# Altium PCB PCB.PcbDoc
Units mm, origin at the board's own origin, x right, y up, seen from the top; angles counter-clockwise.
Board outline 12.7 x 10.16 mm, 2 copper layers (Top Layer, Bottom Layer); 5 components, 8 nets, 20 pads, 0 vias.
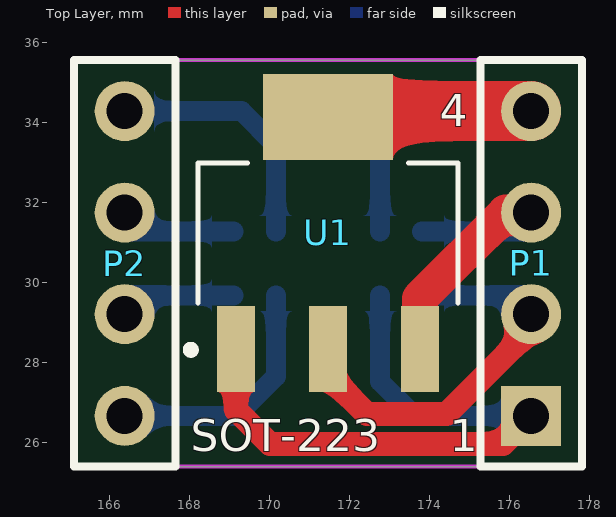
[diagram p0: Top Layer view]
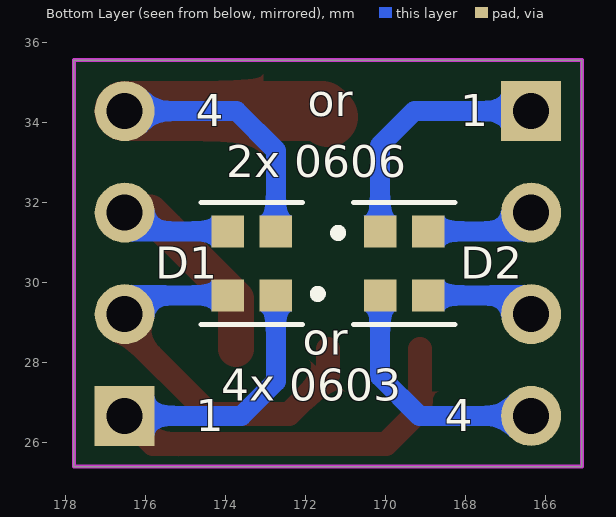
[diagram p1: Bottom Layer view, seen from below]

## Layer stack, top to bottom
Top Solder: solder mask 0.0102, Solder Resist, Dk 3.5
Top Layer: signal copper 0.0356
Dielectric 1: dielectric 0.32, FR-4, Dk 4.8
Bottom Layer: signal copper 0.0356
Bottom Solder: solder mask 0.0102, Solder Resist, Dk 3.5

## Board outline
165.1,35.56 177.8,35.56 177.8,25.4 165.1,25.4

## Design rules (kind name [scope] priority, off if disabled: settings)
Clearance [All] p1: gap=0.152 ignorepadtopadclearanceinfootprint=FALSE except(0: Arc-Hole Track-Hole SMDPad-Hole THPad-Hole Via-Hole Fill-Hole Poly-Hole Region-Hole Text-Hole)
HoleSize [All] p1: absolutevalues=TRUE maxlimit=6.2 minlimit=0.3 maxpercent=80.000 minpercent=20.000
MinimumSolderMaskSliver [All] p1: minsoldermaskwidth=0.1
PolygonConnect ViaConnect [IsVia] p1: connectstyle=Direct reliefconductorwidth=0.254 reliefentries=4 polygonreliefangle="90 Angle" airgapwidth=0.254
PolygonConnect [All] p2: connectstyle=Relief reliefconductorwidth=0.254 reliefentries=4 polygonreliefangle="90 Angle" airgapwidth=0.254
RoutingVias [All] p1: holewidth=0.3 width=0.6 viastyle="Through Hole" minholewidth=0.3 minwidth=0.5 maxholewidth=1 maxwidth=5
SilkToSilkClearance [All] p1: silktosilkclearance=0.1
SilkToSolderMaskClearance [IsPad] p1: minsilkscreentomaskgap=0.1 clearancetoexposedcopper=TRUE
SolderMaskExpansion [All] p1: expansion=0.051
Width [All] p1: maxlimit=25.4 minlimit=0.15 preferedwidth=0.3
26 further rules are at their usual default settings.

## Components (designator, comment, footprint, x,y, rotation, side; value= is the part's Value field where it differs from the comment)
D1 "B38G3RGB-10D0003H2U1930" LED_B38G3RGB-10D0003H2U1930 173.355,30.48 r0 bottom
D2 "B38G3RGB-10D0003H2U1930" LED_B38G3RGB-10D0003H2U1930 169.545,30.48 r180 bottom
P1 "Header 4" HDR1X4#1 176.53,26.67 r90 top locked
P2 "Header 4" HDR1X4#2 166.37,34.29 r270 top
U1 "LM317EMPX/NOPB" SOT230P700X180-4N 171.45,31.242 r90 top

## Footprints (in the part's own frame and the unit in brackets; to place one, negate y for a bottom-side part, rotate by r counter-clockwise, add the part's x,y. Pads: shape width x height; smd on the part's side, far side on the other; paste and mask are expansions set on the pad)
HDR1X4#1 [mm] "Connector; Header; 4 Position"
  rect 1.5x1.5 hole 0.9: 1(0,0)
  round 1.5 hole 0.9: 2(2.54,0) 3(5.08,0) 4(7.62,0)
  silkscreen extent -1.27,-1.27 8.89,1.27
HDR1X4#2 [mm] "Connector; Header; 4 Position"
  round 1.5 / inner rect 1.5x1.5 / far side rect 1.5x1.5 hole 0.9: 1(0,0)
  round 1.5 hole 0.9: 2(2.54,0) 3(5.08,0) 4(7.62,0)
  silkscreen extent -1.27,-1.27 8.89,1.27
LED_B38G3RGB-10D0003H2U1930 [mm]
  rect 0.813x0.8 smd: 1(-0.602,0.8) 2(0.602,0.8) 3(0.602,-0.8) 4(-0.602,-0.8)
  silkscreen extent -1.75,-1.52 1.27,1.52, body extent -0.8,-0.8 0.8,0.8, height 0.4
SOT230P700X180-4N [mm]
  rect 2.15x0.95 smd: 1(-2.9,2.3) 2(-2.9,0) 3(-2.9,-2.3)
  rect 2.15x3.25 smd: 4(2.9,0)
  silkscreen extent -3.02,-3.25 1.75,3.53, body extent -3.5,-3.25 3.5,3.25, height 1.8

## Part data
D1 D2: "Red, Green, Blue (RGB) - LED Indication - Discrete 2V Red, 3V Green, 3V Blue 0606 (1616 Metric)", Package=None, Availability="In Stock", Check_prices=https://www.snapeda.com/parts/B38G3RGB-10D0003H2U1930/Harvatek/view-part/?ref=eda, MF="Harvatek Corporation", MP=B38G3RGB-10D0003H2U1930, Price=None, Purchase-URL=https://pricing.snapeda.com/search/part/B38G3RGB-10D0003H2U1930/?ref=eda, SnapEDA_Link=https://www.snapeda.com/parts/B38G3RGB-10D0003H2U1930/Harvatek/view-part/?ref=snap
P1 P2: "Header, 4-Pin", LatestRevisionDate=17-Jul-2002, LatestRevisionNote="Re-released for DXP Platform.", Publisher="Altium Limited"
U1: "1.5-A, 40-V, adjustable linear voltage regulator 4-SOT-223 0 to 125", Package="SOT-223-4 Texas Instruments", Availability=Unavailable, MF="Texas Instruments", MP=LM317EMPX/NOPB, Price=None, SnapEDA_Link=https://www.snapeda.com/parts/LM317EMPX/NOPB/Texas%20Instruments/view-part/425399/?ref=snap, Texas_Instruments-Purchase-URL=https://snapeda.com/shop?store=Texas+Instruments&id=425399

## Nets (pads, with @x,y where several pads share a name; then routed paths per layer and width w, separated by ;. In a path a pad name is that pad's centre, name@x,y a point inside that pad or via, vN(x,y) a via of type N, cw(c..) or ccw(c..) an arc to the next point about the centre after c; other vN are vias at no path point)
1: D1.1 P1.1 U1.1 | length 15.8
  Top Layer w0.6: U1.1 169.15,26.811 169.999,25.962 175.822,25.962 P1.1
  Bottom Layer w0.5: D1.1 172.753,27.526 173.609,26.67 P1.1
2: D1.2 P1.2 U1.2 | length 10.3
  Top Layer w0.6: U1.2 171.45,27.686 172.421,26.715 174.416,26.715 176.53,28.829 P1.2
  Bottom Layer w0.5: D1.2@173.805,29.68 D1.2 176.06,29.68 P1.2
3: D1.3 P1.3 U1.3 | length 7.9
  Top Layer w0.9: U1.3 173.75,29.605 175.895,31.75 P1.3
  Bottom Layer w0.5: D1.3@173.805,31.28 D1.3 176.06,31.28 P1.3
4: D1.4 P1.4 U1.4 | length 11.4
  Top Layer w1.5: U1.4 171.598,34.29 P1.4
  Bottom Layer w0.5: D1.4 172.753,33.307 173.736,34.29 P1.4
5: D2.1 P2.1 | length 6.3
  Bottom Layer w0.5: P2.1 169.291,34.29 170.147,33.434 D2.1
6: D2.2 P2.2 | length 2.9
  Bottom Layer w0.5: P2.2 166.84,31.28 D2.2 D2.2@169.095,31.28
7: D2.3 P2.3 | length 2.9
  Bottom Layer w0.5: P2.3 166.84,29.68 D2.3 D2.3@169.095,29.68
8: D2.4 P2.4 | length 6.2
  Bottom Layer w0.5: P2.4 169.164,26.67 170.147,27.653 D2.4

## Keep-outs
Keep-Out Layer:
  the board outline again, w0.1

## Silkscreen, mask and mechanical layers (free items; w line width, h text height)
Top Overlay:
  text "4" at 174.244,33.909 h0.8
  text "SOT-223" at 168.021,25.781 h0.8
  text "1" at 174.498,25.781 h0.8
Bottom Overlay:
  text "or" at 171.958,34.163 h0.8
  text "1" at 168.148,33.909 h0.8
  text "4" at 174.752,33.909 h0.8
  text "2x 0606" at 173.99,32.639 h0.8
  text "or" at 172.085,28.194 h0.8
  text "4x 0603" at 174.117,27.051 h0.8
  text "4" at 168.529,26.289 h0.8
  text "1" at 174.752,26.289 h0.8